# EAGLE board BSK5+ARK (EAGLE 9.4.2), part 1 of 2
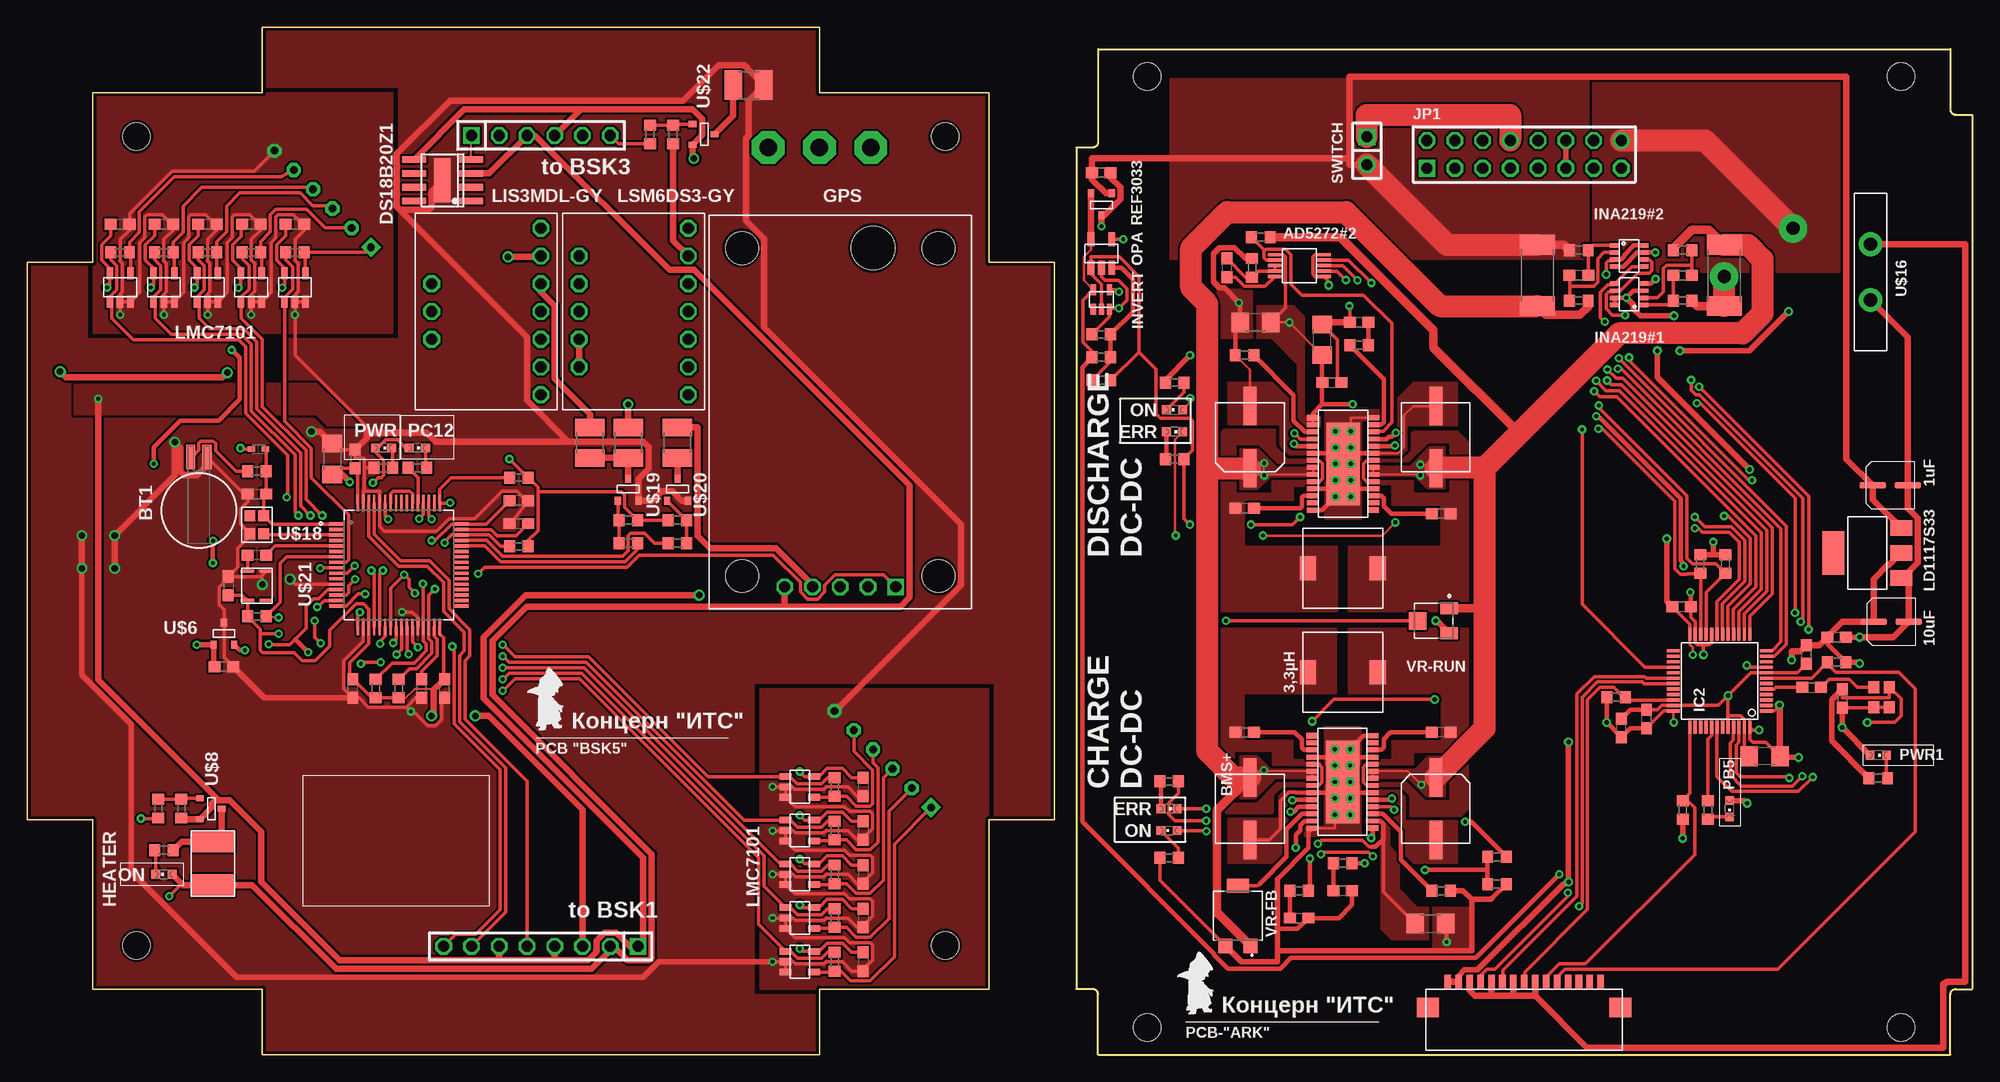
[diagram p0: board, top side]
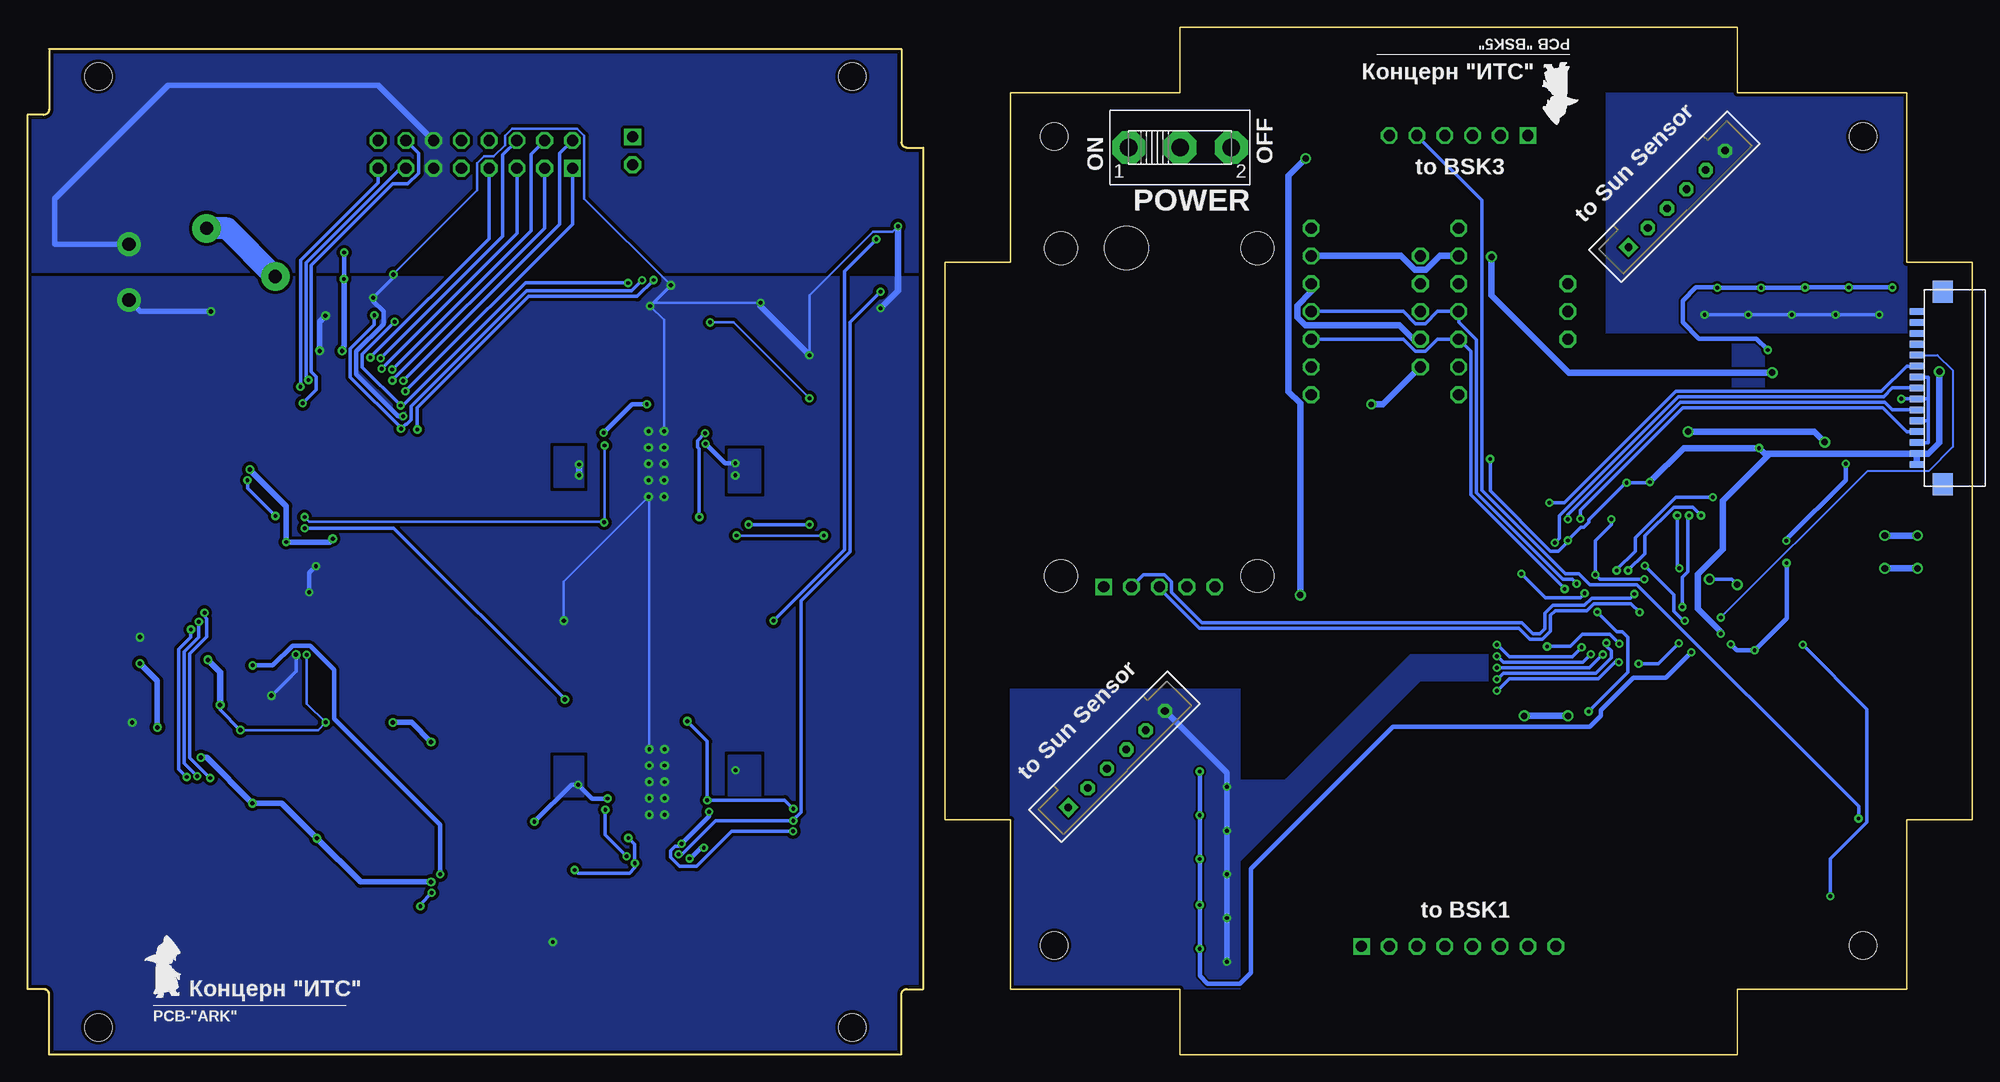
[diagram p1: board, bottom side, seen from below]

Size 178 x 94 mm. Coordinates in mm from the lower left corner, seen from the top.
Outline: 21.5,0 72.5,0 72.5,6 88,6 88,21.5 94,21.5 94,72.5 88,72.5 88,88 72.5,88 72.5,94 21.5,94 21.5,88 6,88 6,72.5 0,72.5 0,66.5 0,55.5 0,21.5 6,21.5 6,6 21.5,6 21.5,0
Outline: 98,92 176,92 176,86.5 arc90 176.5,86 178,86 178,6 176.5,6 arc90 176,5.5 176,0 98,0 98,5.5 arc90 97.5,6 96,6 96,83 97.5,83 arc90 98,83.5 98,92
Copper layers (1*16): Top 0.035mm / dielectric 1.5mm / Bottom 0.035mm
Design rules "default *": minimum track width 0.2mm, minimum drill 0.35mm, track to track 0.2mm, track to pad 0.2mm, pad to pad 0.2mm, via to via 0.2mm, smd to smd 0.2mm, copper to edge 0.25mm, drill to drill 0.1mm, minimum pad ring 0.2mm, minimum via ring 0.2mm, stop-mask expansion 0.05mm, vias tented up to drill 0mil, thermal gap 10mil
Holes 2.5 mm at 10,10 84,84 10,84 84,10 102.5,2.5 171.5,2.5 171.5,89.5 102.5,89.5

## Footprints (pad centres in the part's own frame; a part is rotated, then mirrored left to right if it is on the bottom)
B82472G6 = smd 1.5 x 2.2: 1 -3.2,0; 2 3.2,0
MSOP10 = smd 0.3 x 1.275: 1 -1,-2.24; 2 -0.5,-2.24; 3 0,-2.24; 4 0.5,-2.24; 5 1,-2.24; 6 1,2.24; 7 0.5,2.24; 8 0,2.24; 9 -0.5,2.24; 10 -1,2.24
1X08 = drill 1.016 square: 1 -8.89,0 | drill 1.016 octagon: 2 -6.35,0; 3 -3.81,0; 4 -1.27,0; 5 1.27,0; 6 3.81,0; 7 6.35,0; 8 8.89,0
1X06 = drill 1.016 square: 1 -6.35,0 | drill 1.016 octagon: 2 -3.81,0; 3 -1.27,0; 4 1.27,0; 5 3.81,0; 6 6.35,0
BATTCON-6.8MM = smd 2.25 x 0.85: + 4.87,0.75; - 4.87,-0.75
C0603 = smd 1.1 x 1: 1 -0.85,0; 2 0.85,0
ECAP150-CMD = smd 1.2 x 3.5: P$1 0,2.85; P$2 0,-2.85
C1206 = smd 1.6 x 1.8: 1 -1.4,0; 2 1.4,0
ECAP220-CMD = smd 1.2 x 3.5: P$1 0,2.85; P$2 0,-2.85
ECAP-SMD-D4 = smd 0.6 x 2.4: P+ 0,1.6; P- 0,-1.6
SOD523 = smd 0.7 x 0.5: A 0.7,0; C -0.6,0
SOIC8+HEAT_S = smd 0.6 x 2.2: 1 -1.905,-2.6; 2 -0.635,-2.6; 3 0.635,-2.6; 4 1.905,-2.6; 5 1.905,2.6; 6 0.635,2.6; 7 -0.635,2.6; 8 -1.905,2.6 | smd 4 x 1.5: HEAT 0,0
GPS-NEO6M = drill 1.016 square: P$1 -5.08,16 | drill 1.016 octagon: P$2 -2.54,16; P$3 0,16; P$4 2.54,16; P$5 5.08,16 | hole 3: -9,15; 9,15; -9,-15; 9,-15 | hole 4: -3,-15
EM_HEAT = smd 2 x 4: 1 -2,0; 2 2,0
LQFP48 = smd 0.3 x 1.2: 1 -2.75,-4.25; 2 -2.25,-4.25; 3 -1.75,-4.25; 4 -1.25,-4.25; 5 -0.75,-4.25; 6 -0.25,-4.25; 7 0.25,-4.25; 8 0.75,-4.25; 9 1.25,-4.25; 10 1.75,-4.25; 11 2.25,-4.25; 12 2.75,-4.25; 25 2.75,4.25; 26 2.25,4.25; 27 1.75,4.25; 28 1.25,4.25; 29 0.75,4.25; 30 0.25,4.25; 31 -0.25,4.25; 32 -0.75,4.25; 33 -1.25,4.25; 34 -1.75,4.25; 35 -2.25,4.25; 36 -2.75,4.25 | smd 1.2 x 0.3: 13 4.25,-2.75; 14 4.25,-2.25; 15 4.25,-1.75; 16 4.25,-1.25; 17 4.25,-0.75; 18 4.25,-0.25; 19 4.25,0.25; 20 4.25,0.75; 21 4.25,1.25; 22 4.25,1.75; 23 4.25,2.25; 24 4.25,2.75; 37 -4.25,2.75; 38 -4.25,2.25; 39 -4.25,1.75; 40 -4.25,1.25; 41 -4.25,0.75; 42 -4.25,0.25; 43 -4.25,-0.25; 44 -4.25,-0.75; 45 -4.25,-1.25; 46 -4.25,-1.75; 47 -4.25,-2.25; 48 -4.25,-2.75
SOT23-8 = smd 0.9 x 0.4: 1 -1.3,0.975; 2 -1.3,0.325; 3 -1.3,-0.325; 4 -1.3,-0.975; 5 1.3,-0.975; 6 1.3,-0.325; 7 1.3,0.325; 8 1.3,0.975
SC70 = smd 0.47 x 1: P$1 -0.75,-0.9; P$2 0,-0.9; P$3 0.75,-0.9; P$4 0.75,0.9; P$5 -0.75,0.9
2X08 = drill 1.016 square: 1 -8.89,-1.27 | drill 1.016 octagon: 2 -8.89,1.27; 3 -6.35,-1.27; 4 -6.35,1.27; 5 -3.81,-1.27; 6 -3.81,1.27; 7 -1.27,-1.27; 8 -1.27,1.27; 9 1.27,-1.27; 10 1.27,1.27; 11 3.81,-1.27; 12 3.81,1.27; 13 6.35,-1.27; 14 6.35,1.27; 15 8.89,-1.27; 16 8.89,1.27
SOT223 = smd 4 x 2: P$1 0,3.1 | smd 1.4 x 2: P$2 -2.29,-3.1; P$3 0,-3.1; P$4 2.29,-3.1
CHIPLED_0603 = smd 0.8 x 0.8: A 0,-0.75; C 0,0.75
LIS3MDL-GY = drill 1.016 octagon: P$1 -7.62,-5; P$2 -5.08,-5; P$3 -2.54,-5; P$4 0,-5; P$5 2.54,-5; P$6 5.08,-5; P$7 7.62,-5; P$8 -2.54,5; P$9 0,5; P$10 2.54,5
LSM6DS3-GY = drill 1.016 octagon: P$1 -7.62,-5; P$2 -5.08,-5; P$3 -2.54,-5; P$4 0,-5; P$5 2.54,-5; P$6 5.08,-5; P$7 7.62,-5; P$8 -5.08,5; P$9 -2.54,5; P$10 0,5; P$11 2.54,5; P$12 5.08,5
SOT23-5 = smd 0.635 x 1.27: P$1 -0.95,-1.3; P$2 0,-1.3; P$3 0.95,-1.3; P$4 0.95,1.3; P$5 -0.95,1.3
R0603 = smd 1 x 1.1: 1 -0.85,0; 2 0.85,0
R1210 = smd 1.6 x 2.7: 1 -1.4,0; 2 1.4,0
R2512 = smd 1.8 x 3.2: 1 -2.8,0; 2 2.8,0
SOT23-3 = smd 0.56 x 0.73: 1 -0.95,-1; 2 0.95,-1; 3 0,1
UNICS-SWITCH = drill 1.6 pad 3 octagon: 1 -4.7,0; 2 0,0; 3 4.7,0
1X02 = drill 1.016 square: 1 -1.27,0 | drill 1.016 octagon: 2 1.27,0
OC2E08000XCCDRX = smd 1.1 x 1: P$1 0.925,0.725; P$2 -0.925,0.725; P$3 -0.925,-0.725; P$4 0.925,-0.725
QFP50P1200X1200X160-64N = smd 1.47 x 0.28: 1 -5.67,3.75; 2 -5.67,3.25; 3 -5.67,2.75; 4 -5.67,2.25; 5 -5.67,1.75; 6 -5.67,1.25; 7 -5.67,0.75; 8 -5.67,0.25; 9 -5.67,-0.25; 10 -5.67,-0.75; 11 -5.67,-1.25; 12 -5.67,-1.75; 13 -5.67,-2.25; 14 -5.67,-2.75; 15 -5.67,-3.25; 16 -5.67,-3.75; 33 5.67,-3.75; 34 5.67,-3.25; 35 5.67,-2.75; 36 5.67,-2.25; 37 5.67,-1.75; 38 5.67,-1.25; 39 5.67,-0.75; 40 5.67,-0.25; 41 5.67,0.25; 42 5.67,0.75; 43 5.67,1.25; 44 5.67,1.75; 45 5.67,2.25; 46 5.67,2.75; 47 5.67,3.25; 48 5.67,3.75 | smd 0.28 x 1.47: 17 -3.75,-5.67; 18 -3.25,-5.67; 19 -2.75,-5.67; 20 -2.25,-5.67; 21 -1.75,-5.67; 22 -1.25,-5.67; 23 -0.75,-5.67; 24 -0.25,-5.67; 25 0.25,-5.67; 26 0.75,-5.67; 27 1.25,-5.67; 28 1.75,-5.67; 29 2.25,-5.67; 30 2.75,-5.67; 31 3.25,-5.67; 32 3.75,-5.67; 49 3.75,5.67; 50 3.25,5.67; 51 2.75,5.67; 52 2.25,5.67; 53 1.75,5.67; 54 1.25,5.67; 55 0.75,5.67; 56 0.25,5.67; 57 -0.25,5.67; 58 -0.75,5.67; 59 -1.25,5.67; 60 -1.75,5.67; 61 -2.25,5.67; 62 -2.75,5.67; 63 -3.25,5.67; 64 -3.75,5.67
LMC7101 = smd 1.1 x 0.6: P$1 -1.3,0.95; P$2 -1.3,0; P$3 -1.3,-0.95; P$4 1.3,-0.95; P$5 1.3,0.95
68611 = smd 0.6 x 1.3: P$1 -7,0.65; P$2 -6,0.65; P$3 -5,0.65; P$4 -4,0.65; P$5 -3,0.65; P$6 -2,0.65; P$7 -1,0.65; P$8 0,0.65; P$9 1,0.65; P$10 2,0.65; P$11 3,0.65; P$12 4,0.65; P$13 5,0.65; P$14 6,0.65; P$15 7,0.65 | smd 2 x 1.8: P$16 8.8,-1.7; P$17 -8.8,-1.7
LTC3119+VIA = smd 0.45 x 1.05: 1 -4.225,-2.775; 2 -3.575,-2.775; 3 -2.925,-2.775; 4 -2.275,-2.775; 5 -1.625,-2.775; 6 -0.975,-2.775; 7 -0.325,-2.775; 8 0.325,-2.775; 9 0.975,-2.775; 10 1.625,-2.775; 11 2.275,-2.775; 12 2.925,-2.775; 13 3.575,-2.775; 14 4.225,-2.775; 15 4.225,2.775; 16 3.575,2.775; 17 2.925,2.775; 18 2.275,2.775; 19 1.625,2.775; 20 0.975,2.775; 21 0.325,2.775; 22 -0.325,2.775; 23 -0.975,2.775; 24 -1.625,2.775; 25 -2.275,2.775; 26 -2.925,2.775; 27 -3.575,2.775; 28 -4.225,2.775 | smd 7.56 x 3.05: 29 0,0 | drill 0.35 pad 0.813: P$1 -3,0.7; P$2 -1.5,0.7; P$3 0,0.7; P$4 1.5,0.7; P$5 3,0.7; P$6 3,-0.7; P$7 1.5,-0.7; P$8 0,-0.7; P$9 -1.5,-0.7; P$10 -3,-0.7
MF-R400 = drill 1.2 pad 2.184: P$1 0,2.55; P$2 0,-2.55
Q32.768 = smd 1 x 1: P$1 -0.825,-0.625; P$2 0.825,-0.625; P$3 0.825,0.625; P$4 -0.825,0.625
Q24 = smd 0.3 x 1.2: P$1 -1.325,-0.85; P$2 1.325,-0.85; P$3 1.325,0.85; P$4 -1.325,0.85
TRIM_3314G-1-504E = smd 1.3 x 1.3: 1 1.15,-2.75; 3 -1.15,-2.75 | smd 2 x 1.3: 2 0,2.75
TRIM_3313J-1-205E = smd 1.1 x 1.6: 1 1.15,-1.45; 3 -1.15,-1.45 | smd 1.6 x 1.6: 2 0,1.45
B6B-EH-A = drill 0.7 pad 1.3 square: 1 6.25,0 | drill 0.7 pad 1.3 octagon: 2 3.75,0; 3 1.25,0; 4 -1.25,0; 5 -3.75,0; 6 -6.25,0

## Placement (x,y rotation side)
3,3µH  3,3µ  [B82472G6]  120.4,35 0 top
3,3µH1  3,3µH  [B82472G6]  120.4,44.5 180 top
AD5272#2  AD5272  [MSOP10]  116.41,72.2 270 top
BSK1  [1X08]  47,9.9 180 top
BSK3  [1X06]  47,84.1 0 top
BT1  6.8MM_COIN_CELL  [BATTCON-6.8MM]  15.7,49.8 90 top
C1  10nF  [C0603]  21,51.3 0 top
C2  100nF  [C0603]  16.5,76 0 top
C3  470nF  [C0603]  18,35.5 180 top
C4  1nF  [C0603]  21,45.7 180 top
C5  10nF  [C0603]  18.4,42.9 270 top
C6  100nF  [C0603]  12.5,76 0 top
C7  100nF  [C0603]  8.5,76 0 top
C8  100nF  [C0603]  76.5,8.5 270 top
C9  2,2µ  [C0603]  36.1,33.5 90 top
C10  150µ  [ECAP150-CMD]  128.9,56.5 180 top
C11  100nF  [C0603]  76.5,20.5 270 top
C12  100nF  [C0603]  76.5,24.5 270 top
C13  2,2µ  [C0603]  45,48.6 0 top
C14  100nF  [C0603]  24.5,76 0 top
C15  100nF  [C0603]  20.5,76 0 top
C16  100nF  [C0603]  76.5,12.5 270 top
C17  100nF  [C0603]  76.5,16.5 270 top
C18  100nF  [C0603]  45,50.7 180 top
C19  10µ  [C1206]  27.9,54.5 270 top
C20  100nF  [C0603]  30,54.5 270 top
C21  220µ  [ECAP220-CMD]  111.9,56.5 180 top
C22  100nF  [C0603]  145.9,29.9 90 top
C23  100nF  [C0603]  165.6,38.2 0 top
C24  10µ  [C1206]  159,27.3 180 top
C25  100nF  [C0603]  162.8,36.6 270 top
C26  100nF  [C0603]  151.4,41 0 top
C27  100nF  [C0603]  148.2,30.7 90 top
C28  0,1µ  [C0603]  151.5,71.3 0 top
C29  0,1µ  [C0603]  142,71.3 180 top
C30  1nF  [C0603]  163.3,33.6 0 top
C31  10nF  [C0603]  166.1,32.6 270 top
C32  1µ  [C0603]  109.8,72 90 top
C33  470nF  [C0603]  98.3,80.7 180 top
C34  10uF  [ECAP-SMD-D4]  170.6,39.6 90 top
C35  1uF  [ECAP-SMD-D4]  170.5,52.1 90 top
C40  0,1µ  [C0603]  129.4,29.5 180 top
C41  0,1µ  [C0603]  111.4,29.5 0 top
C44  680p  [C0603]  116.4,12.5 0 top
C45  4.7µ  [C1206]  128.4,12 0 top
C46  3,3n  [C0603]  120.4,15 0 top
C47  150µ  [ECAP150-CMD]  111.9,22.5 0 top
C48  220µ  [ECAP220-CMD]  128.9,22.5 0 top
C49  0,1µ  [C0603]  111.4,50 0 top
C50  0,1µ  [C0603]  129.4,49.5 180 top
C52  680p  [C0603]  121.9,67 180 top
C53  4.7µ  [C1206]  112.4,67 180 top
C54  100nF  [C0603]  29.8,33.5 90 top
C55  100nF  [C0603]  38.2,33.5 90 top
C56  0,1µ  [C0603]  119.4,61.5 0 top
C57  10µ  [C1206]  118.5,65.4 90 top
D1  BB141  [SOD523]  21.2,55.4 180 top
DS18B20Z1  DS18B20Z  [SOIC8+HEAT_S]  38,80 90 top
GPS  GPSNEO6M  [GPS-NEO6M]  74.4,58.8 180 top
HEATER  EM_HEAT  [EM_HEAT]  17,17.5 90 top
IC2  STM32F103C8T  [LQFP48]  154.9,34.2 90 top
INA219#1  INA219AID  [SOT23-8]  146.6,69.58 180 top
INA219#2  INA219AID  [SOT23-8]  146.6,73.08 0 top
INVERT  INVERTER.  [SC70]  98.3,69.1 0 top
JP1  [2X08]  137,82.37 0 top
LD1117S33  LD1117S33  [SOT223]  168.4,45.9 90 top
LED_G1  [CHIPLED_0603]  104.5,20.5 90 top
LED_G2  [CHIPLED_0603]  105,59 90 top
LED_R1  [CHIPLED_0603]  105,57 270 top
LED_R2  [CHIPLED_0603]  104.5,22.5 270 top
LIS3MDL-GY  LIS3MDL-GY  [LIS3MDL-GY]  42,68 90 top
LSM6DS3-GY  LSM6DS3-GY  [LSM6DS3-GY]  55.5,68 90 top
ON  [CHIPLED_0603]  12.5,16.5 90 top
OPA  OPA333  [SOT23-5]  98.3,73.3 0 top
PB5  [CHIPLED_0603]  155.8,22.5 180 top
PC12  [CHIPLED_0603]  35.7,55.5 270 top
PWR  [CHIPLED_0603]  32.6,55.5 270 top
PWR1  [CHIPLED_0603]  169.4,27.4 270 top
R1  10k  [R0603]  21,40.1 180 top
R2  10k  [R0603]  45,46.5 0 top
R3  10k  [R0603]  45,52.8 0 top
R4  24k9  [R0603]  12.5,73.4 180 top
R5  24k9  [R0603]  8.5,73.4 180 top
R6  24k9  [R0603]  73.9,8.5 90 top
R7  2k  [R0603]  12.5,18.7 0 top
R8  1M  [R0603]  14.1,22.5 270 top
R9  24k9  [R0603]  73.9,20.5 90 top
R10  620R  [R0603]  21,53.4 0 top
R11  150k  [R0603]  111.4,64 0 top
R12  24k9  [R0603]  73.9,24.5 90 top
R13  24k9  [R0603]  24.5,73.4 180 top
R14  24k9  [R0603]  20.5,73.4 180 top
R15  2k  [R0603]  35.7,53.7 0 top
R16  2k  [R0603]  32.6,53.7 0 top
R17  150k  [R0603]  121.9,64.9 0 top
R18  24k9  [R0603]  73.9,12.5 90 top
R19  24k9  [R0603]  73.9,16.5 90 top
R20  0.5A  [R1210]  66,88.7 0 top
R21  0.2A  [R1210]  59.5,56 270 top
R22  1M  [R0603]  59.5,48.9 0 top
R23  0.05A  [R1210]  55,56 270 top
R24  1M  [R0603]  55,48.9 180 top
R25  5k1  [R0603]  31.9,33.5 90 top
R26  5k1  [R0603]  34,33.5 90 top
R27  2k  [R0603]  105,61.5 0 top
R28  24k9  [R0603]  16.5,73.4 180 top
R29  100R  [R0603]  12,22.5 90 top
R30  100R  [R0603]  57,84.2 90 top
R31  100R  [R0603]  55,46.8 180 top
R32  100R  [R0603]  59.5,46.8 0 top
R33  1M  [R0603]  59.1,84.2 90 top
R34  0.05A  [R1210]  51.5,56 270 top
R35  2k  [R0603]  105,54.5 180 top
R36  10k  [R0603]  151.5,22.4 90 top
R37  14K3  [R0603]  112.1,72 90 top
R38  91K  [R0603]  112.9,74.8 180 top
R39  430k  [R0603]  98.3,65.9 0 top
R40  680k  [R0603]  98.3,61.7 180 top
R41  120k  [R0603]  98.3,63.8 0 top
R57  2k  [R0603]  104.5,25 180 top
R64  10k  [R0603]  145.4,32.7 0 top
R65  1M  [R0603]  134.5,18.1 0 top
R66  10k  [R0603]  120.4,17.5 0 top
R67  150k  [R0603]  134.5,15.6 180 top
R68  150k  [R0603]  129.4,15 180 top
R69  150k  [R0603]  116.4,15 180 top
R71  R01  [R2512]  155.3,71.3 270 top
R73  10R  [R0603]  151.5,69 180 top
R74  10R  [R0603]  151.5,73.6 0 top
R75  R01  [R2512]  138.2,71.3 90 top
R76  10R  [R0603]  142,73.6 0 top
R77  10R  [R0603]  142,69 180 top
R79  10k  [R0603]  165.6,35.9 180 top
R81  2k  [R0603]  153.8,22.4 270 top
R82  2k  [R0603]  169.4,25.3 0 top
R100  2k  [R0603]  104.5,18 0 top
R101  5k1  [R0603]  155.4,44.9 270 top
R102  5k1  [R0603]  153.1,44.9 270 top
REF3033  REF3033  [SOT23-3]  98.3,77.8 180 top
S1  [UNICS-SWITCH]  72.5,83 0 bottom
SWITCH  [1X02]  122.6,82.7 270 top
TCXO  OC2E08000XCCDRX  [OC2E08000XCCDRX]  169.7,32.7 270 top
U1  STM32F405RGT6  [QFP50P1200X1200X160-64N]  34,44.8 0 top
U$1  LMC7101  [LMC7101]  12.5,70.2 90 top
U$2  LMC7101  [LMC7101]  8.5,70.2 90 top
U$3  LMC7101  [LMC7101]  70.7,8.5 0 top
U$4  LMC7101  [LMC7101]  70.7,20.5 0 top
U$5  LMC7101  [LMC7101]  70.7,24.5 0 top
U$6  REF3033  [SOT23-3]  18,38.5 0 top
U$7  LMC7101  [LMC7101]  24.5,70.2 90 top
U$8  SI2302CDS  [SOT23-3]  16.8,22.5 270 top
U$9  LMC7101  [LMC7101]  20.5,70.2 90 top
U$10  LMC7101  [LMC7101]  70.7,12.5 0 top
U$11  LMC7101  [LMC7101]  70.7,16.5 0 top
U$12  FFC-CONNECT68611  [68611]  4.4,61 90 bottom
U$13  PCB "BSK5"  [ITS-LOGO]  46.5,29 0 top
U$14  LTC31191  [LTC3119+VIA]  120.42,54.05 90 top
U$15  FFC-CONNECT68611  [68611]  137,6 0 top
U$16  MF-R400  [MF-R400]  168.7,71.6 180 top
U$17  PCB-"ARK"  [ITS-LOGO]  106,3 0 top
U$18  Q32.768  [Q32.768]  21,48.5 270 top
U$19  SI2302CDS  [SOT23-3]  55,51.7 0 top
U$20  SI2302CDS  [SOT23-3]  59.5,51.7 0 top
U$21  Q24  [Q24]  21,42.9 90 top
U$22  SI2302CDS  [SOT23-3]  61.9,84.2 270 top
U$23  LMC7101  [LMC7101]  16.5,70.2 90 top
U$24  PCB-"ARK"  [ITS-LOGO]  166.5,4.5 0 bottom
U$26  PCB "BSK5"  [ITS-LOGO]  36.8,91.5 180 bottom
U$59  LTC31191  [LTC3119+VIA]  120.38,24.95 270 top
VR-FB  3314G-1-504E  [TRIM_3314G-1-504E]  110.8,12.7 0 top
VR-RUN  3313J-1-205E  [TRIM_3313J-1-205E]  128.7,39.7 90 top
X1  JST-6A  [B6B-EH-A]  78.3,27.04 225 bottom
X11  JST-6A  [B6B-EH-A]  27.04,78.3 225 bottom

## Library data of the parts
3,3µH 3,3µH1 AD5272#2 C10 C21 C34 C35 C47 C48 DS18B20Z1 GPS HEATER IC2 INA219#1 INA219#2 INVERT LD1117S33 LIS3MDL-GY LSM6DS3-GY OPA REF3033 TCXO U$1-U$24 U$26 U$59 VR-FB X1 X11 = CanCubeSat
BSK1 BSK3 JP1 SWITCH = pinheadCS
BT1 = SparkFun-Batteries; PROD_ID: BATT-13734
C1-C9 C11-C20 C22-C33 C40 C41 C44-C46 C49 C50 C52-C57 = rcl; SPICEPREFIX: C
D1 = diode
LED_G1 LED_G2 LED_R1 LED_R2 ON PB5 PC12 PWR PWR1 = led
R1-R19 R22 R24-R33 R35-R41 R57 R64-R69 R73 R74 R76 R77 R79 R81 R82 R100-R102 = resistor
R20 R21 R23 R34 R71 R75 = rcl; SPICEPREFIX: R
S1 = cansat-lib
U1 = STM32F405RGT6; DESCRIPTION: High-performance foundation line, ARM Cortex-M4 core with DSP and FPU, 1 Mbyte Flash, 168 MHz CPU, ART Accelerator; DIGI-KEY_PART_NUMBER: 497-11767-ND; DIGI-KEY_PURCHASE_URL: https://www.digikey.com/product-detail/en/stmicroelectronics/STM32F405RGT6/497-11767-ND/2754208?utm_source=snapeda&utm_medium=aggregator&utm_campaign=symbol; MF: STMicroelectronics; MP: STM32F405RGT6; PACKAGE: LQFP-64 STMicroelectronics
VR-RUN = CanCubeSat; AVAILABILITY: Good; DESCRIPTION: 100 kOhms 0.125W, 1/8W J Lead Surface Mount Trimmer Potentiometer Cermet 1 Turn Top Adjustment; MF: Bourns; MP: 3313J-1-104E; PACKAGE: 5025 Bourns; PRICE: None; PURCHASE-URL: https://pricing.snapeda.com/search/part/3313J-1-104E/?ref=eda

## Nets
1: HEATER.2 R7.2 U$8.3
1W: BSK3.1 DS18B20Z1.4
1W1: IC2.17 JP1.7
3V1: C22.1 C23.1 C24.1 C25.1 C26.1 C27.1 C31.2 C34.P+ IC2.1 IC2.24 IC2.36 IC2.48 INA219#1.4 INA219#2.4 INA219#2.7 LD1117S33.P$3 PB5.A PWR1.A R36.1 R64.1 R79.1 R101.1 R102.1 TCXO.P$1 TCXO.P$4 U$15.P$1 U$15.P$2
3V3: BSK1.3 C5.2 C18.2 C19.2 C20.2 C54.2 C55.2 D1.A LIS3MDL-GY.P$6 LSM6DS3-GY.P$6 PC12.A PWR.A R1.2 R2.2 R3.2 R22.1 R24.1 R25.1 R26.1 R33.1 U1.19 U1.32 U1.48 U1.64 U$12.P$1 U$12.P$2 U$21.P$4
3V3-STAB: C2.1 C6.1 C7.1 C8.1 C11.1 C12.1 C14.1 C15.1 C16.1 C17.1 U1.13 U$1.P$5 U$2.P$5 U$3.P$5 U$4.P$5 U$5.P$5 U$6.2 U$7.P$5 U$9.P$5 U$10.P$5 U$11.P$5 U$23.P$5
3V3-STAB1: IC2.9 INVERT.P$5 OPA.P$5 R41.1 REF3033.2
5V: BSK1.2 BSK3.3 C3.2 DS18B20Z1.3 GPS.P$5 HEATER.1 ON.A U$6.1
90: R65.1 R66.2 R67.2 U$59.15
A: INVERT.P$2 OPA.P$1 R35.1 R40.1 U$14.18
B5-KHEAT: BSK3.5 R29.1
BMS1: IC2.16 JP1.1
BMS2: IC2.15 JP1.2
BMS3: IC2.14 JP1.3
BMS4: IC2.13 JP1.4
BMS5: IC2.12 JP1.5
BMS6: IC2.11 JP1.6
BMS+: C33.2 C35.P+ LD1117S33.P$4 R75.2 R76.1 REF3033.1 SWITCH.2
BMS+_OUT: JP1.8 SWITCH.1
BUS+: BSK3.2
BUS+1: JP1.16 R71.2 R73.1
BUS+_EXTERNAL: S1.2
BUSPLUS_EXTERNAL: S1.1
CELL: C1.2 D1.C R10.2 U1.1 U$18.P$4
DPD_RST: AD5272#2.7 IC2.28
GND: BT1.- C1.1 C2.2 C3.1 C5.1 C6.2 C7.2 C8.2 C9.1 C11.2 C12.2 C13.1 C14.2 C15.2 C16.2 C17.2 C18.1 C19.1 C20.1 C54.1 C55.1 DS18B20Z1.HEAT R16.1 R20.2 U1.12 U1.18 U1.28 U1.60 U1.63 U$1.P$2 U$1.P$3 U$2.P$2 U$2.P$3 U$3.P$2 U$3.P$3 U$4.P$2 U$4.P$3 U$5.P$2 U$5.P$3 U$6.3 U$7.P$2 U$7.P$3 U$9.P$2 U$9.P$3 U$10.P$2 U$10.P$3 U$11.P$2 U$11.P$3 U$18.P$2 U$19.2 U$20.2 U$21.P$2 U$23.P$2 U$23.P$3 X1.6 X11.6
GND1: AD5272#2.6 AD5272#2.10 C10.P$2 C21.P$2 C22.2 C23.2 C24.2 C25.2 C26.2 C27.2 C31.1 C33.1 C34.P- C35.P- C44.2 C45.2 C46.2 C47.P$2 C48.P$2 C52.2 C53.2 C56.2 C57.2 IC2.8 IC2.20 IC2.23 IC2.35 IC2.44 IC2.47 INA219#1.3 INA219#1.7 INA219#1.8 INA219#2.3 INA219#2.8 INVERT.P$3 LD1117S33.P$2 OPA.P$2 R11.1 R27.1 R37.2 R39.1 R67.1 R68.1 R82.1 R100.1 REF3033.3 TCXO.P$2 U$14.4 U$14.9 U$14.14 U$14.20 U$14.25 U$14.28 U$14.29 U$14.P$1 U$14.P$2 U$14.P$3 U$14.P$4 U$14.P$5 U$14.P$6 U$14.P$7 U$14.P$8 U$14.P$9 U$14.P$10 U$16.P$1 U$59.4 U$59.9 U$59.14 U$59.20 U$59.25 U$59.28 U$59.29 U$59.P$1 U$59.P$2 U$59.P$3 U$59.P$4 U$59.P$5 U$59.P$6 U$59.P$7 U$59.P$8 U$59.P$9 U$59.P$10 VR-FB.3 VR-RUN.3
GND-GPS: R21.2 U$20.3
GND-MAG: R23.2 R34.2 U$19.3
GND-OUT: BSK1.1 BSK1.4 BSK1.6 BSK3.4 DS18B20Z1.5 R8.2 U$8.2 U$12.P$3 U$12.P$5 U$12.P$7 U$12.P$9 U$22.2
GND-OUT1: JP1.11 JP1.12 U$15.P$3 U$15.P$5 U$15.P$7 U$15.P$9 U$16.P$2
GPS: R32.1 U1.45
INA_BMS+: C21.P$1 C47.P$1 R75.1 R77.1 U$14.19 U$14.22 U$14.23 U$59.6 U$59.7 VR-FB.1
INA_BUS+: C10.P$1 C48.P$1 R38.1 R65.2 R71.1 R74.1 U$14.6 U$14.7 U$59.19 U$59.22 U$59.23 VR-RUN.1
MAG: R31.1 U1.44
N$1: U1.3 U$18.P$3
N$2: R20.1 U$22.3
N$3: C28.2 INA219#1.2 R74.2
N$4: R13.1 U$7.P$4 X11.1
N$5: R6.1 U$3.P$4 X1.1
N$6: R9.1 U$4.P$4 X1.4
N$7: R8.1 R29.2 U$8.1
N$8: C30.2 TCXO.P$3
N$9: C30.1 IC2.5
N$10: R30.2 R33.2 U$22.1
N$11: R24.2 R31.2 U$19.1
N$12: LSM6DS3-GY.P$5 LSM6DS3-GY.P$8 LSM6DS3-GY.P$9 R23.1
N$13: R22.2 R32.2 U$20.1
N$14: LIS3MDL-GY.P$5 R34.1
N$15: AD5272#2.3 AD5272#2.4 C32.2 R37.1
N$16: AD5272#2.2 R38.2 U$14.12
N$17: PB5.C R81.2
N$18: OPA.P$3 R39.2 R40.2 R41.2
N$26: BT1.+ R10.1
N$27: GPS.P$4 R21.1
N$28: U1.54 U1.58
N$29: C13.2 U1.47
N$30: R4.1 U$1.P$4 X11.4
N$31: R5.1 U$2.P$4 X11.5
N$33: ON.C R7.1
N$35: R12.1 U$5.P$4 X1.5
N$36: C9.2 U1.31
N$37: PC12.C R15.2
N$38: R15.1 U1.53
N$40: PWR.C R16.2
N$41: GPS.P$2 U1.16
N$42: GPS.P$3 U1.17
N$43: C4.2 U$21.P$3
N$44: C4.1 U1.5
N$45: R28.1 U$23.P$4 X11.3
N$46: R14.1 U$9.P$4 X11.2
N$47: R18.1 U$10.P$4 X1.2
N$48: R19.1 U$11.P$4 X1.3
N$51: AD5272#2.5 C32.1
N$77: 3,3µH1.2 C49.1 U$14.21 U$14.24
N$78: 3,3µH1.1 C50.1 U$14.5 U$14.8
N$79: R11.2 U$14.17
N$80: C49.2 U$14.26
N$81: R17.1 U$14.13
N$82: C52.1 R17.2
N$84: C50.2 U$14.3
N$85: LED_R1.A R35.2
N$87: LED_R2.A R57.2
N$89: U$59.12 VR-FB.2
N$91: LED_G1.C R100.2
N$92: LED_G2.C R27.2
N$129: C41.2 U$59.3
N$131: 3,3µH.2 C40.1 U$59.21 U$59.24
N$132: 3,3µH.1 C41.1 U$59.5 U$59.8
N$135: R69.1 U$59.13
N$136: C44.1 R69.2
N$139: C46.1 R66.1
N$142: R68.2 U$59.17
N$144: C40.2 U$59.26
N$147: C28.1 INA219#1.1 R73.2
N$150: C29.1 INA219#2.1 R76.2
N$151: C29.2 INA219#2.2 R77.2
N$159: PWR1.C R82.2
N$161: IC2.41 R81.1
N$215: AD5272#2.1 C53.1 C56.1 C57.1 LED_G2.A U$14.11 U$14.15 U$14.16
N$234: C45.1 LED_G1.A U$59.11 U$59.16
NRST: R1.1 U1.7 U$12.P$11
NRST1: IC2.7 R79.2 U$15.P$11
PGOOD1: IC2.19 LED_R2.C U$59.10
PGOOD2: IC2.18 LED_R1.C U$14.10
RUN: OPA.P$4 VR-RUN.2
RX-S: U1.52 U$12.P$4
RX-S1: IC2.31 U$15.P$4
SCL: LIS3MDL-GY.P$4 LSM6DS3-GY.P$4 R25.2 U1.29
SCL1: AD5272#2.9 IC2.21 INA219#1.5 INA219#2.5 R101.2
SCL-TM: BSK1.5 U1.61
SCLTM: IC2.45 JP1.13
SDA: LIS3MDL-GY.P$3 LSM6DS3-GY.P$3 R26.2 U1.30
SDA1: AD5272#2.8 IC2.22 INA219#1.6 INA219#2.6 R102.2
SDA-TM: BSK1.7 U1.62
SDATM: IC2.46 JP1.14
SINS-KVCC: BSK3.6 R30.1
SS1: R28.2 U1.15 U$23.P$1
SS2: R4.2 U1.20 U$1.P$1
SS3: R5.2 U1.21 U$2.P$1
SS4: R6.2 U1.10 U$3.P$1
SS5: R9.2 U1.26 U$4.P$1
SS6: R12.2 U1.27 U$5.P$1
SS7: R13.2 U1.8 U$7.P$1
SS8: R14.2 U1.9 U$9.P$1
SS9: R18.2 U1.24 U$10.P$1
SS10: R19.2 U1.25 U$11.P$1
SWC: R3.1 U1.49 U$12.P$10
SWC1: IC2.37 R36.2 U$15.P$10
SWD: R2.1 U1.46 U$12.P$8
SWD1: IC2.34 R64.2 U$15.P$8
TIME: IC2.42 JP1.15
TIME-ES: BSK1.8 U1.22
TIME-G: GPS.P$1 U1.14 U1.23 U1.59
TX-S: U1.51 U$12.P$6
TX-S1: IC2.30 U$15.P$6
Y: INVERT.P$4 R57.1 U$59.18